# EAGLE board pi_zero_shield_v1_KW (EAGLE 9.6.2)
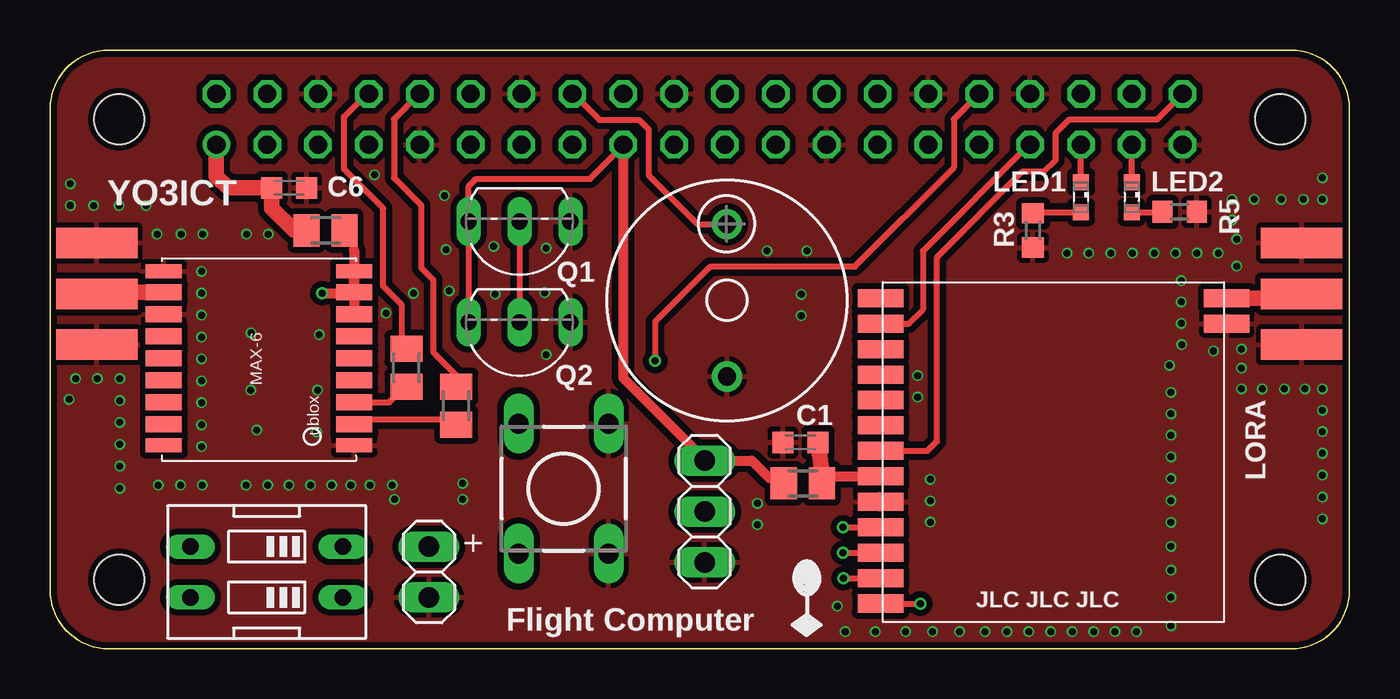
[diagram p0: board, top side]
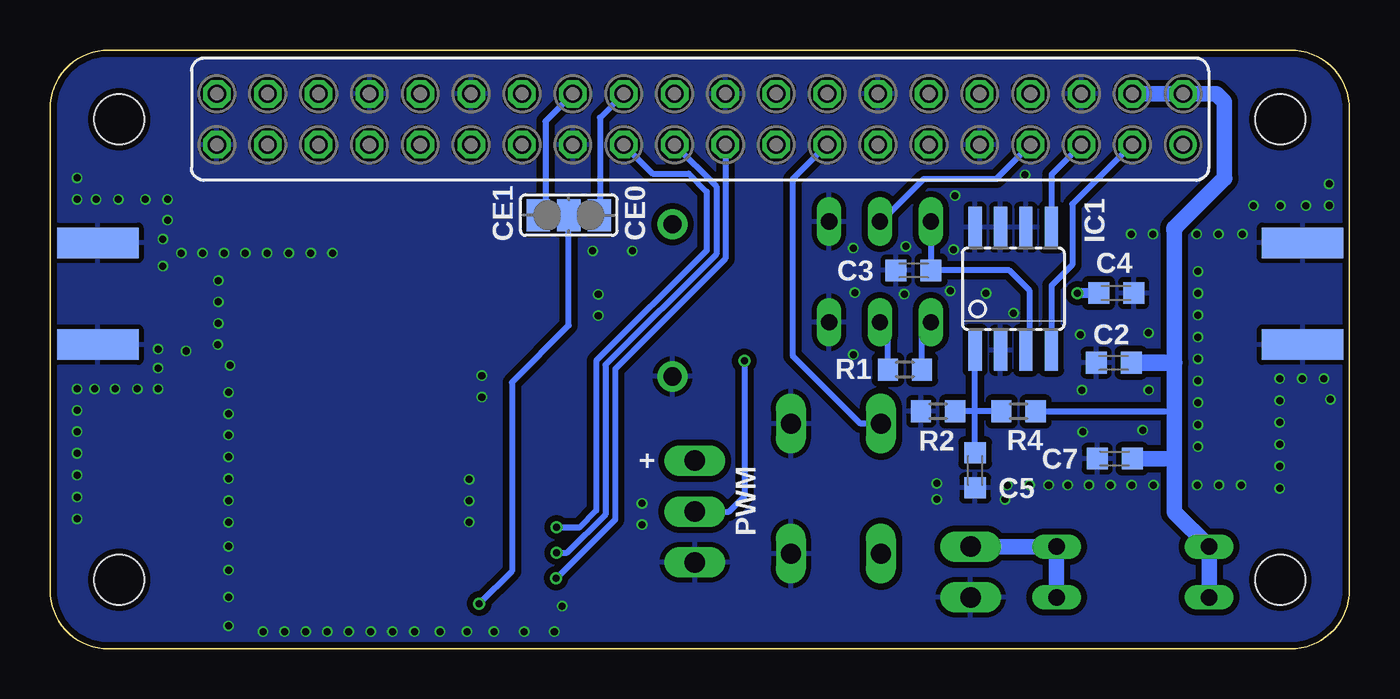
[diagram p1: board, bottom side, seen from below]

Size 64.9 x 29.9 mm. Coordinates in mm from the lower left corner, seen from the top.
Outline: 2.95,29.9 arc90 0,26.95 0,2.95 arc90 2.95,0 61.98,0 arc90 64.9,2.92 64.9,26.97 arc90 61.98,29.9 2.95,29.9
Copper layers (1*16): Top 0.035559375mm / dielectric 1.6mm / Bottom 0.035559375mm
Design rules "Arxterra-HLCpcb-2-layer-KW": minimum track width 6mil, minimum drill 0.3mm, track to track 6mil, track to pad 6mil, pad to pad 6mil, via to via 10mil, smd to smd 6mil, copper to edge 8mil, drill to drill 6mil, minimum pad ring 5mil, minimum via ring 3mil, stop-mask expansion 2.5mil, vias tented up to drill 25mil, thermal gap 10mil
Net classes: 0 default: width 0.152 mm, drill 0.305 mm, clearance 0.152 mm; 1 vcc: width 0.152 mm, clearance 0.152 mm
Holes 2.5 mm at 3.45,26.44 61.44,26.44 3.45,3.45 61.44,3.45

## Footprints (pad centres in the part's own frame; a part is rotated, then mirrored left to right if it is on the bottom)
1X02 = drill 1.016 long: 1 -1.27,0; 2 1.27,0
C0603K = smd 1.05 x 1.08: 1 -0.875,0; 2 0.875,0
SJ_2 = smd 1.168 x 1.6: 1 -1.524,0; 2 0,0; 3 1.524,0
M0805 = smd 1.3 x 1.6: 1 -0.95,0; 2 0.95,0
SOIC08 = smd 0.66 x 2.032: 1 -1.905,-3.073; 2 -0.635,-3.073; 3 0.635,-3.073; 4 1.905,-3.073; 5 1.905,3.073; 6 0.635,3.073; 7 -0.635,3.073; 8 -1.905,3.073
SMA-EDGE = smd 1.524 x 4.064: GND@0 0,0; GND@1 5.08,0; SIG 2.54,0 | smd 1.524 x 4.064 bottom: GND@2 0,0; GND@3 5.08,0
1X03 = drill 1.016 long: 1 -2.54,0; 2 0,0; 3 2.54,0
SML0603 = smd 0.8 x 0.8: A 0.75,0; C -0.75,0
TO92-CBE = drill 0.813 long: B 0,0; C 2.54,0; E -2.54,0
R0603 = smd 1 x 1.1: 1 -0.85,0; 2 0.85,0
DTS-6 = drill 1 long: 1 -3.25,2.25; 2 3.25,2.25; 3 -3.25,-2.25; 4 3.25,-2.25
BMT1205XH7.5 = drill 0.9 pad 1.5: + 3.8,0; - -3.8,0
FE20-2 = drill 0.914: 1 -24.13,1.27 | drill 0.914 octagon: 2 -24.13,-1.27; 3 -21.59,1.27; 4 -21.59,-1.27; 5 -19.05,1.27; 6 -19.05,-1.27; 7 -16.51,1.27; 8 -16.51,-1.27; 9 -13.97,1.27; 10 -13.97,-1.27; 11 -11.43,1.27; 12 -11.43,-1.27; 13 -8.89,1.27; 14 -8.89,-1.27; 15 -6.35,1.27; 16 -6.35,-1.27; 17 -3.81,1.27; 18 -3.81,-1.27; 19 -1.27,1.27; 20 -1.27,-1.27; 21 1.27,1.27; 22 1.27,-1.27; 23 3.81,1.27; 24 3.81,-1.27; 25 6.35,1.27; 26 6.35,-1.27; 27 8.89,1.27; 28 8.89,-1.27; 29 11.43,1.27; 30 11.43,-1.27; 31 13.97,1.27; 32 13.97,-1.27; 33 16.51,1.27; 34 16.51,-1.27; 35 19.05,1.27; 36 19.05,-1.27; 37 21.59,1.27; 38 21.59,-1.27; 39 24.13,1.27; 40 24.13,-1.27
EDG-02 = drill 0.813 long: 1 -1.27,-3.81; 2 1.27,-3.81; 3 1.27,3.81; 4 -1.27,3.81
UBLOX_MAX-6 = smd 1.8 x 0.7: 1_GND 4.95,-4.4; 9_V_RESET 4.95,4.3; 10_GND -4.55,4.3; 18_RESERVED -4.55,-4.4 | smd 1.8 x 0.8: 2_TXD1 4.95,-3.35; 3_RXD1 4.95,-2.25; 4_TIMEPULSE 4.95,-1.15; 5_EXTINT0 4.95,-0.05; 6_V_BCKP 4.95,1.05; 7_VCC_IO 4.95,2.15; 8_VCC 4.95,3.25; 11_RF_IN -4.55,3.25; 12_GND -4.55,2.15; 13_ANTON -4.55,1.05; 14_VCC_RF -4.55,-0.05; 15_RESERVED -4.55,-1.15; 16_SDA2 -4.55,-2.25; 17_SCL2 -4.55,-3.35
LORA_DRF = smd 2.27 x 0.9: P$1 -8.609,7.497; P$2 -8.609,6.227; P$3 -8.608,4.958; P$4 -8.608,3.688; P$5 -8.609,2.417; P$6 -8.609,1.147; P$7 -8.608,-0.122; P$8 -8.608,-1.392; P$9 -8.61,-2.663; P$10 -8.61,-3.933; P$11 -8.609,-5.202; P$12 -8.609,-6.472; P$13 -8.609,-7.743; P$14 8.673,6.235; P$15 8.675,7.506

## Placement (x,y rotation side)
+  [1X02]  18.92,3.84 270 top
C1  1uF 0603  [C0603K]  37.48,10.31 180 top
C2  100nF 0603  [C0603K]  11.78,14.28 180 bottom
C3  100nF 0603  [C0603K]  21.77,18.9 180 bottom
C4  100nF 0603  [C0603K]  11.65,17.77 0 bottom
C5  100nF 0603  [C0603K]  18.69,8.91 270 bottom
C6  1uF 0603  [C0603K]  11.94,23.01 0 top
C7  1uF 0603  [C0603K]  11.72,9.5 180 bottom
CH_SEL  [SJ_2]  38.99,21.66 0 bottom
CHOKE1  74279220601  [M0805]  13.75,20.89 0 top
CHOKE2  74279220601  [M0805]  17.8,14.03 270 top
CHOKE3  74279220601  [M0805]  20.29,12.14 270 top
CHOKE4  74279220601  [M0805]  37.59,8.27 180 top
IC1  MCP3426_ignore pin names  [SOIC08]  16.79,17.98 0 bottom
J$1  SMA_EDGE  [SMA-EDGE]  2.34,15.19 90 top
J$2  SMA_EDGE  [SMA-EDGE]  62.51,15.19 90 top
JP1  [1X03]  32.69,6.86 90 top
LED1  [SML0603]  51.49,22.56 270 top
LED2  [SML0603]  54.03,22.56 270 top
Q1  DS18B20  [TO92-CBE]  23.44,21.34 180 top
Q2  DS18B20  [TO92-CBE]  23.44,16.31 180 top
R1  4k7 0603  [R0603]  22.2,13.94 180 bottom
R2  10k 0603  [R0603]  20.54,11.86 180 bottom
R3  330 0603  [R0603]  49.09,20.89 90 top
R4  20k 0603  [R0603]  16.52,11.86 180 bottom
R5  330 0603  [R0603]  56.41,21.82 180 top
S1  DTS-6  [DTS-6]  25.65,8 270 top
SG1  BUZZER  [BMT1205XH7.5]  33.81,17.4 90 top
SV1  [FE20-2]  32.44,26.44 180 bottom
SW1  [EDG-02]  10.82,3.84 90 top
U1  U1  [UBLOX_MAX-6]  10.24,14.55 0 top
U2  LORA  [LORA_DRF]  50.09,10.01 0 top

## Library data of the parts
+ JP1 = pinhead
C1-C7 = rcl; SPICEPREFIX: C
CH_SEL = jumper
CHOKE1-CHOKE4 R1-R5 = rcl; SPICEPREFIX: R
IC1 = optocoupler; OC_FARNELL: unknown; OC_NEWARK: unknown
J$1 J$2 = SparkFun
LED1 LED2 = led
Q1 Q2 = transistor-pnp
S1 = switch-tact
SG1 = buzzer; OC_FARNELL: unknown; OC_NEWARK: unknown
SV1 = con-lsta_new; OC_FARNELL: unknown; OC_NEWARK: unknown
SW1 = special
U1 = ava
U2 = lora

## Nets
3V3#1: C6.1 CHOKE1.1 SV1.1
3V3#2: C3.1 CHOKE4.2 IC1.3 JP1.3 Q1.C Q2.C R1.1 SV1.17
5V_IN: C2.1 C7.1 R4.1 SV1.2 SV1.4 SW1.3 SW1.4
BUTTON: S1.3 SV1.15
BUZZER: SG1.+ SV1.16
CS0: CH_SEL.3 SV1.24
CS1: CH_SEL.1 SV1.26
DIO0: SV1.33 U2.P$2
DIO5: SV1.40 U2.P$7
DQ: Q1.B Q2.B R1.2 SV1.7
DRF_VCC: C1.1 CHOKE4.1 U2.P$8
GND: +.2 C1.2 C2.2 C3.2 C4.2 C5.2 C6.2 C7.2 IC1.2 IC1.6 IC1.7 IC1.8 J$1.GND@0 J$1.GND@1 J$1.GND@2 J$1.GND@3 J$2.GND@0 J$2.GND@1 J$2.GND@2 J$2.GND@3 JP1.1 Q1.E Q2.E R2.2 R3.1 R5.1 S1.1 S1.2 SG1.- SV1.6 SV1.9 SV1.14 SV1.20 SV1.25 SV1.30 SV1.34 SV1.39 U1.1_GND U1.10_GND U1.12_GND U2.P$9 U2.P$14
GPS_RX/PI_TX: CHOKE2.1 SV1.8
GPS_TX/PI_RX: CHOKE3.1 SV1.10
LED1: LED1.C SV1.35
LED2: LED2.C SV1.37
MISO: SV1.21 U2.P$11
MOSI: SV1.19 U2.P$12
N$1: +.1 SW1.1 SW1.2
N$2: J$2.SIG U2.P$15
N$3: LED1.A R3.2
N$7: CHOKE2.2 U1.3_RXD1
N$8: LED2.A R5.2
N$9: CHOKE3.2 U1.2_TXD1
N$10: C4.1 CHOKE1.2 U1.7_VCC_IO U1.8_VCC U1.9_V_RESET
N$14: J$1.SIG U1.11_RF_IN
N$15: C5.1 IC1.1 R2.1 R4.2
NSS: CH_SEL.2 U2.P$13
PWM: JP1.2 SV1.32
SCK: SV1.23 U2.P$10
SCL: IC1.5 SV1.5
SDA: IC1.4 SV1.3

## Tracks (layer width: path | path; a pad name or v marks a point on that pad's centre or on a via)
3V3#1
  Top 0.762: SV1.1 8.31,23.6 8.89,23.01 C6.1 11.06,22.01 12.18,20.89 CHOKE1.1
3V3#2
  Top 0.305: Q2.C Q1.C 20.9,23.09 21.28,23.47 26.98,23.47 28.63,25.12 SV1.17
  Top 0.508: SV1.17 28.63,13.54 32.74,9.42 32.71,9.42 JP1.3 35.05,9.4 35.92,8.53 36.37,8.53 CHOKE4.2
  Bottom 0.305: IC1.3 16,15.07 16,17.9 16.99,18.9 C3.1 Q1.C | R1.1 21.35,15.86 Q2.C
5V_IN
  Bottom 0.305: R4.1 8.74,11.86
  Bottom 0.762: SW1.4 SW1.3 8.74,6.83 8.74,9.45 | 8.74,9.45 8.74,11.86 8.74,14.29 8.74,20.9 | SV1.4 SV1.2 6.66,27.71 6.25,27.31 6.25,25.07 6.24,23.5 | C7.1 8.79,9.5 8.74,9.45
  Bottom 0.813: 8.74,20.9 8.74,21 6.24,23.5 | C2.1 8.74,14.28 8.74,14.29
BUTTON
  Bottom 0.305: S1.3 24.42,11.25 27.81,14.64 27.81,23.44 SV1.15
BUZZER
  Top 0.305: SV1.16 26.14,27.71 27.43,26.42 29.41,26.42 29.9,25.93 29.9,23.65 32.34,21.2 SG1.+
CS0
  Bottom 0.305: CH_SEL.3 37.44,21.68 37.44,26.52 SV1.24
CS1
  Bottom 0.305: CH_SEL.1 40.16,22.01 40.16,26.34 SV1.26
DIO0
  Top 0.305: U2.P$2 42.9,16.23 43.59,16.92 43.59,19.86 48.9,25.17 SV1.33
DIO5
  Top 0.305: U2.P$7 43.82,9.89 44.3,10.36 44.3,19.56 48.55,23.81 49.62,23.81 50.22,24.4 50.22,25.75 50.91,26.44 55.3,26.44 SV1.40
DQ
  Top 0.305: Q1.B Q2.B
  Bottom 0.305: Q1.B 23.39,21.34 21.26,23.47 17.63,23.47 SV1.7 | R1.2 23.05,15.91 Q2.B
DRF_VCC
  Top 0.508: 41.43,8.56 U2.P$8 38.89,8.62 CHOKE4.1
  Top 0.762: CHOKE4.1 38.54,8.82 C1.1
GND  (via drill 0.35)
  other vias: 10.9,20.7 9.82,20.7 7.63,20.7 6.54,20.7 1.02,22.14 1.02,23.22 1.27,13.49 2.36,13.49 3.48,13.49 3.48,12.4 3.48,11.3 3.48,10.21 3.48,9.12 10.87,8.18 11.94,8.18 9.79,8.18 7.61,8.18 13,8.18 14.07,8.18 6.52,8.18 55.14,19.76 56.21,19.76 54.06,19.76 52.97,19.76 51.88,19.76 57.28,19.76 58.34,19.76 50.79,19.76 55.98,10.67 55.98,11.73 55.98,9.59 55.98,8.5 55.98,7.4 55.98,12.8 56.51,15.19 55.98,6.31 51.05,0.86 52.12,0.86 49.97,0.86 48.88,0.86 47.79,0.86 53.19,0.86 54.25,0.86 46.7,0.86 43.97,6.32 43.97,7.39 43.97,8.46 56.49,18.39 56.49,17.32 56.49,16.26 16.77,16.76 10.04,15.77 17.2,7.46 18.15,17.75 7.57,18.85 7.57,17.75 7.57,16.66 7.57,15.57 7.57,14.48 7.57,13.39 7.57,12.29 20.61,7.47 35.81,19.88 37.8,19.88 19.7,22.63 13.32,10.84 10.33,10.92 7.57,11.19 7.57,10.1 43.33,12.57 43.33,13.64 37.52,16.64 37.52,17.7 35.33,6.2 35.33,7.26 63.55,10.85 63.55,11.91 63.55,9.77 63.55,8.67 63.55,7.58 63.55,12.98 63.55,6.49 63.55,22.44 63.55,23.52 19.94,17.87 19.78,19.93 22.16,20.09 24.78,20.01 24.7,17.79 22.24,17.71 24.78,14.69 16.21,23.66 3.48,8.01 5.4,8.18 15.02,8.18 15.98,8.18 17.09,8.18 20.61,8.26 13.44,15.69 13.36,12.91 10.03,12.91 5.35,20.7 2.17,22.13 3.44,22.13 4.79,22.13 0.95,12.46 62.68,12.98 61.65,12.98 60.53,12.98 59.5,12.98 59.5,14.01 59.5,14.96 62.6,22.44 61.49,22.44 60.14,22.44 59.03,22.44 59.03,21.41 59.26,20.46 59.26,19.11 58.1,14.87 55.9,14.15 55.98,5.12 55.98,3.93 55.98,2.58 55.98,1.15 45.43,0.86 44.08,0.86 42.73,0.86 41.22,0.86 39.71,0.86 39.32,2.13
  pour Top (isolate 0.305): -0.1,30.23 65.35,30.23 65.35,-0.74 -0.1,-0.74
  pour Bottom (isolate 0.305): -0.25,30.12 65.28,30.12 65.28,-0.61 -0.25,-0.61
GPS_RX/PI_TX
  Top 0.305: SV1.8 15.82,27.71 14.68,26.57 14.68,23.95 16.64,22 16.64,18.1 17.55,17.18 17.55,15.23 CHOKE2.1
GPS_TX/PI_RX
  Top 0.305: SV1.10 18.44,27.71 17.17,26.44 17.17,23.51 18.54,22.15 18.54,19.02 19.14,18.42 19.14,14.82 20.29,13.67 CHOKE3.1
LED1
  Top 0.305: LED1.C SV1.35
LED2
  Top 0.305: LED2.C SV1.37
MISO  (via drill 0.35 pad 0.6)
  Top 0.305: v39.6,4.8 U2.P$11
  Bottom 0.305: SV1.21 31.62,23.09 31.62,19.71 37.16,14.17 37.16,6.71 39.07,4.8 v39.6,4.8
MOSI  (via drill 0.35 pad 0.6)
  Top 0.305: v39.62,3.53 U2.P$12
  Bottom 0.305: SV1.19 31.17,19.48 36.68,13.97 36.68,6.45 39.6,3.53 v39.62,3.53
N$1
  Bottom 0.762: +.1 SW1.2 SW1.1
N$2
  Top 0.762: U2.P$15 62.36,17.51 J$2.SIG
N$3
  Top 0.305: R3.2 49.16,21.8 LED1.A
N$7
  Top 0.305: U1.3_RXD1 16.94,12.3 17.72,13.08 CHOKE2.2
N$8
  Top 0.305: LED2.A 55.55,21.8 R5.2
N$9
  Top 0.305: U1.2_TXD1 15.42,11.44 20.04,11.44 CHOKE3.2
N$10  (via drill 0.35 pad 0.6)
  Top 0.305: 15.09,18.85 U1.9_V_RESET | 15.19,17.78 U1.8_VCC | CHOKE1.2 15.19,20.89 15.19,19.9
  Top 0.406: 15.14,17.75 U1.8_VCC | 14.81,18.85 15.09,18.85
  Top 0.508: U1.8_VCC U1.9_V_RESET | U1.8_VCC U1.7_VCC_IO | v13.59,17.75 15.14,17.75 | 15.19,19.9 U1.8_VCC
  Bottom 0.406: 13.58,17.77 v13.59,17.75
  Bottom 0.508: C4.1 13.58,17.77
N$14
  Top 0.762: J$1.SIG 2.41,17.8 U1.11_RF_IN
N$15
  Bottom 0.305: R4.2 18.69,11.86 | 18.69,11.86 R2.1 | C5.1 18.69,11.86 | 18.69,11.86 IC1.1
NSS  (via drill 0.35 pad 0.6)
  Top 0.305: U2.P$13 43.53,2.27 43.54,2.26 v43.46,2.26
  Bottom 0.305: v43.46,2.26 41.83,3.89 41.83,13.31 38.99,16.15 CH_SEL.2
PWM  (via drill 0.35 pad 0.6)
  Top 0.305: SV1.32 45.14,26.44 45.14,24.03 40.18,19.07 32.97,19.07 30.23,16.33 v30.23,14.38
  Bottom 0.305: v30.23,14.38 30.23,7.62 30.99,6.86 JP1.2
SCK  (via drill 0.35 pad 0.6)
  Top 0.305: v39.6,6.07 U2.P$10
  Bottom 0.305: SV1.23 34.8,23.72 32.99,23.72 32.11,22.83 32.11,19.89 37.62,14.38 37.62,6.91 38.46,6.07 v39.6,6.07
SCL
  Bottom 0.305: IC1.5 14.88,23.67 SV1.5
SDA
  Bottom 0.305: IC1.4 14.88,18.14 13.84,19.18 13.84,22.2 10.87,25.17 SV1.3

## Text on the board
tNames: YO3ICT | JLC JLC JLC | Flight Computer
bNames: CE0 | CE1 | + | PWM